# Altium PCB PCB.PcbDoc
Units mm, origin at the board's own origin, x right, y up, seen from the top; angles counter-clockwise.
Board outline 100 x 50 mm, 2 copper layers (Top Layer, Bottom Layer); 25 components, 19 nets, 85 pads, 0 vias.
Unrouted connection lines stored in the file: 1.
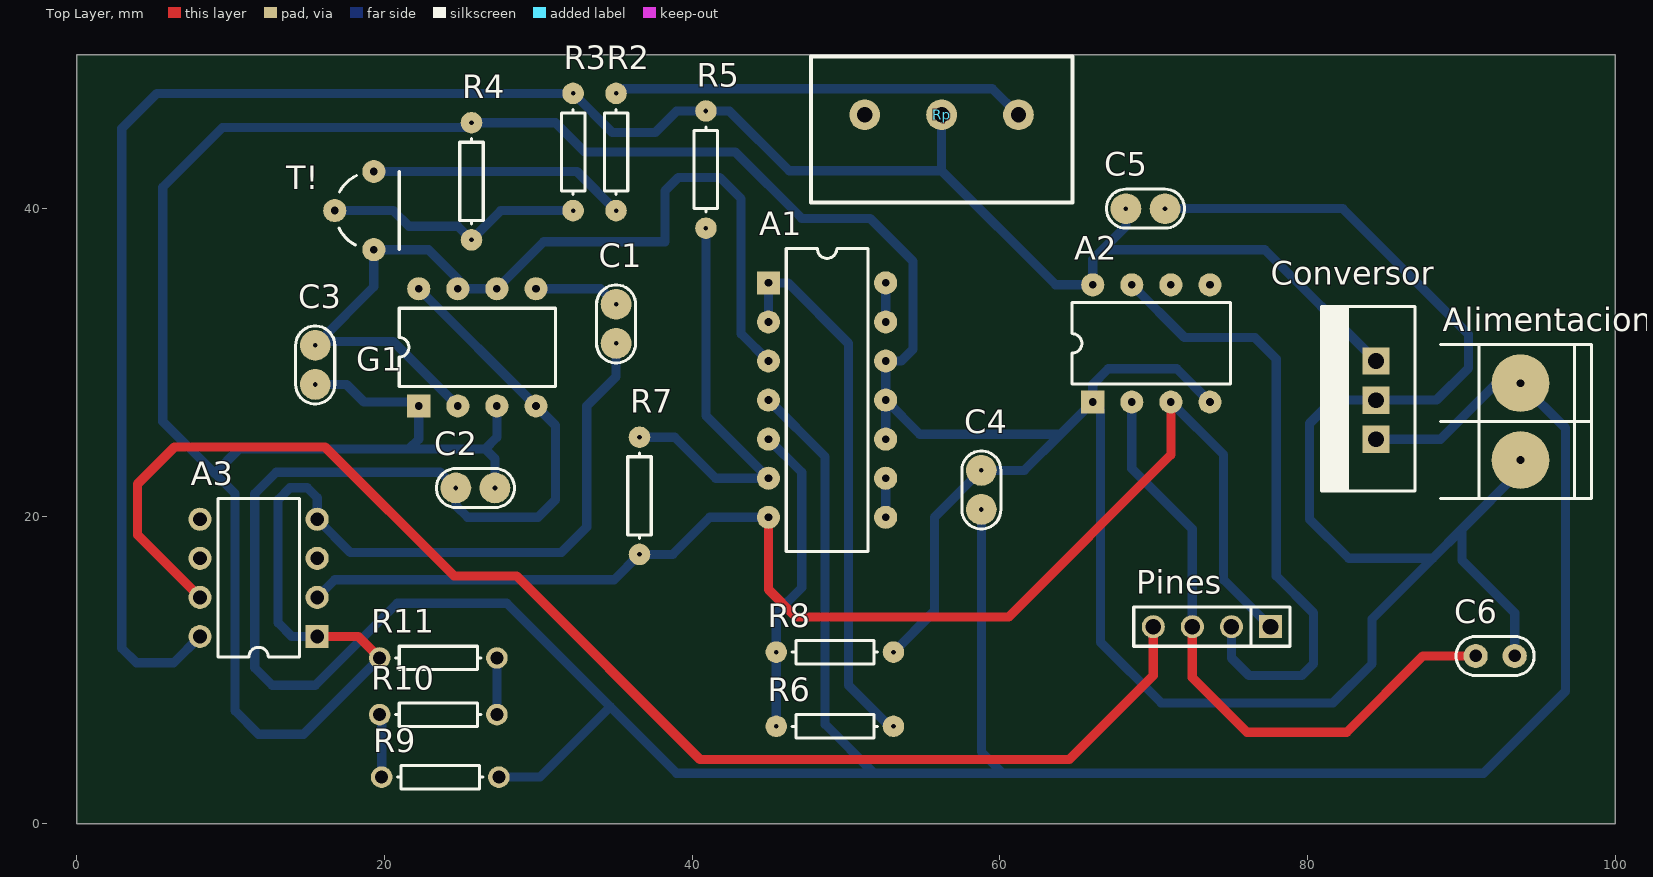
[diagram p0: Top Layer view]
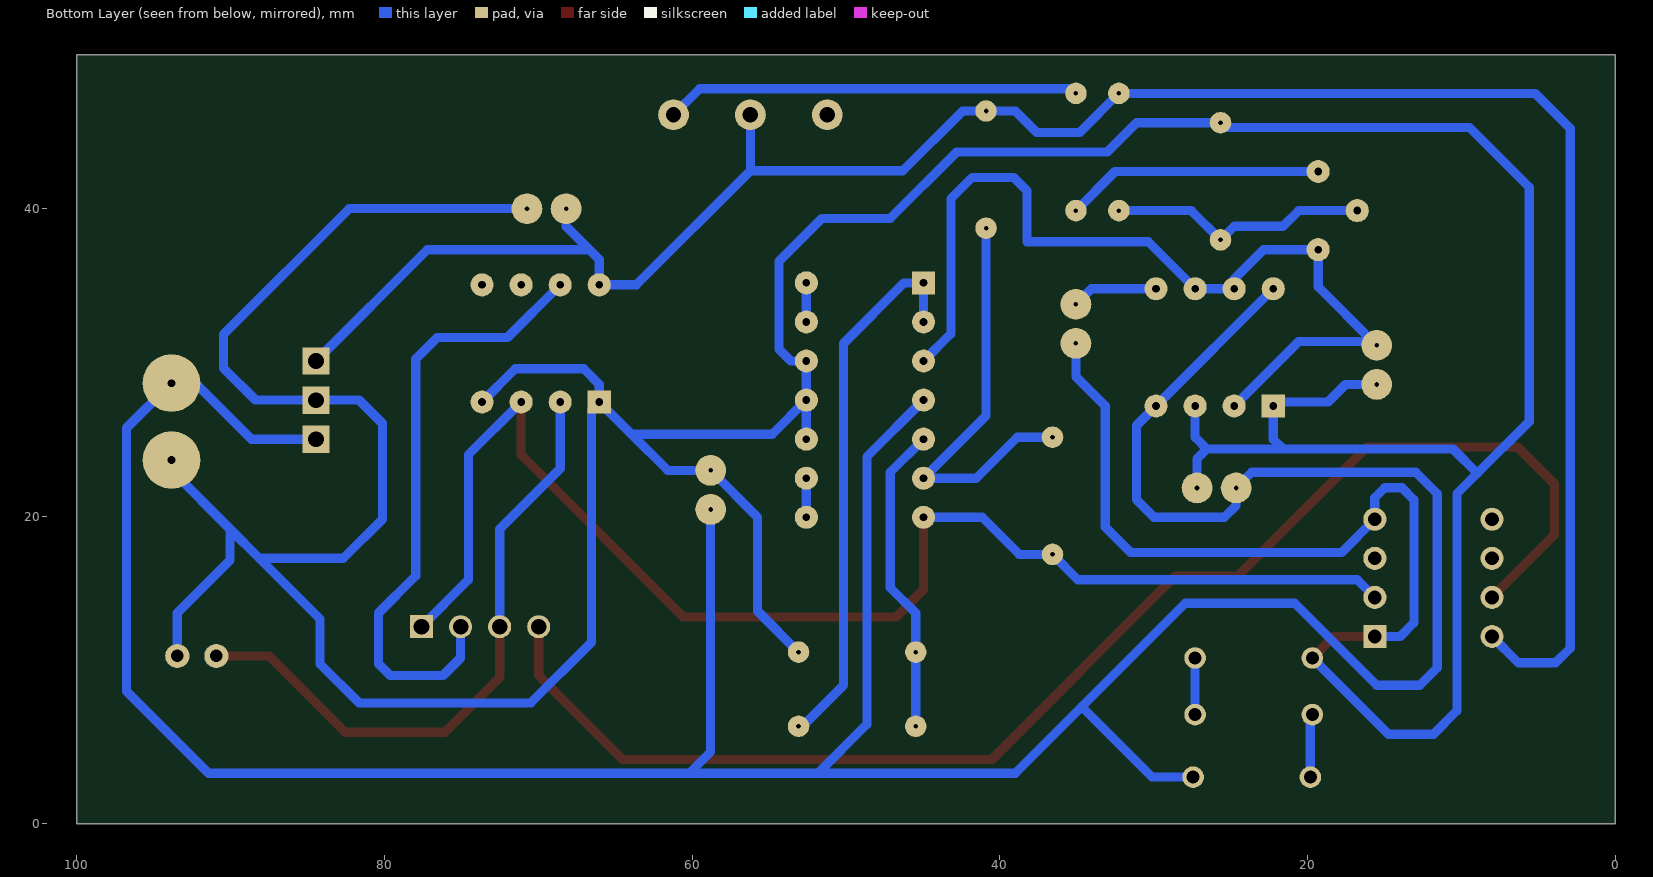
[diagram p1: Bottom Layer view, seen from below]

## Layer stack, top to bottom
Top Solder: solder mask 0.0102, Solder Resist, Dk 3.5
Top Layer: signal copper 0.0356
Dielectric 1: dielectric 0.32, FR-4, Dk 4.8
Bottom Layer: signal copper 0.0356
Bottom Solder: solder mask 0.0102, Solder Resist, Dk 3.5

## Board outline
0,0 100,0 100,50 0,50

## Design rules (kind name [scope] priority, off if disabled: settings)
Clearance [All] p1: gap=0.4
PolygonConnect [All] p1: connectstyle=Relief reliefconductorwidth=0.254 reliefentries=4 polygonreliefangle="90 Angle" airgapwidth=0.254
RoutingVias [All] p1: holewidth=0.5 width=2 viastyle="Through Hole" minholewidth=0.5 minwidth=2 maxholewidth=0.5 maxwidth=2
SolderMaskExpansion [All] p1: expansion=0.102
Width [All] p1: maxlimit=0.6 minlimit=0.6 preferedwidth=0.6
30 further rules are at their usual default settings.

## Components (designator, comment, footprint, x,y, rotation, side; value= is the part's Value field where it differs from the comment)
A1 "LM324N" N014 48.768,27.559 r270 top
A2 "LM111JG" JG008#1 69.85,31.242 r0 top
A3 "LM111JG" JG008#2 11.811,16.002 r90 top
Alimentacion "BORNERA 2" BORNERA2 93.853,26.162 r180 top
C1 "0.1u" CAP100#1 35.052,32.512 r270 top
C2 "1p" CAP100#1 25.908,21.844 r0 top
C3 "220u" CAP100#1 15.494,29.845 r270 top
C4 "100n" CAP100#1 58.801,21.717 r90 top
C5 "100n" CAP100#1 69.469,40.005 r0 top
C6 "110u" CAP100#2 92.202,10.922 r0 top
Conversor "7805" "TO-220 V" 84.455,27.559 r90 top
G1 "LM555" DIP8 22.225,27.178 r90 top
Pines "CON4" SIP4 73.787,12.827 r180 top
R2 "Res1" AXIAL-0.3#1 35.052,43.688 r90 top
R3 "Res1" AXIAL-0.3#1 32.258,43.688 r90 top
R4 "Res1" AXIAL-0.3#1 25.654,41.783 r270 top
R5 "Res1" AXIAL-0.3#1 40.894,42.545 r90 top
R6 "Res1" AXIAL-0.3#1 49.276,6.35 r0 top
R7 "Res1" AXIAL-0.3#1 36.576,21.336 r90 top
R8 "Res1" AXIAL-0.3#1 49.276,11.176 r180 top
R9 "Res1" AXIAL-0.3#2 23.622,3.048 r0 top
R10 "Res1" AXIAL-0.3#2 23.495,7.112 r180 top
R11 "Res1" AXIAL-0.3#2 23.495,10.795 r0 top
Rp "POTENCIOMETRO" POTENCIOMETRO 56.214,46.101 r180 top
T! "TRANSISTOR PNP" TO92 18.034,39.878 r270 top

## Footprints (in the part's own frame and the unit in brackets; to place one, negate y for a bottom-side part, rotate by r counter-clockwise, add the part's x,y. Pads: shape width x height; smd on the part's side, far side on the other; paste and mask are expansions set on the pad)
AXIAL-0.3#1 [mm] "Axial Device, Thru-Hole; 2 Leads; 0.3 in Pin Spacing"
  round 1.4 hole 0.3: 1(-3.81,0) 2(3.81,0)
  silkscreen extent -2.77,-0.76 2.77,0.76
AXIAL-0.3#2 [mm] "Axial Device, Thru-Hole; 2 Leads; 0.3 in Pin Spacing"
  round 1.4 hole 0.85: 1(-3.81,0) 2(3.81,0)
  silkscreen extent -2.77,-0.76 2.77,0.76
BORNERA2 [mm] "Bornera con Tornillos 5mm separación"
  round 3.75 hole 0.5: 1(0,2.5) 2(0,-2.5)
  silkscreen extent -4.6,-5 5.2,5, body extent -3.76,-4.89 3.94,5.61, height 10
CAP100#1 [mm]
  round 2 hole 0.3: 1(-1.27,0) 2(1.27,0)
  silkscreen extent -2.54,-1.27 2.54,1.27, body extent -2.92,-0.84 2.92,0.86, height 6.12
CAP100#2 [mm]
  round 1.575 hole 0.813: 1(-1.27,0) 2(1.27,0)
  silkscreen extent -2.54,-1.27 2.54,1.27, body extent -2.92,-0.84 2.92,0.86, height 6.12
DIP8 [mm]
  rect 1.5x1.5 hole 0.5: 1(0,0)
  round 1.5 hole 0.5: 2(0,-2.54) 3(0,-5.08) 4(0,-7.62) 5(7.62,-7.62) 6(7.62,-5.08) 7(7.62,-2.54) 8(7.62,0)
  silkscreen extent 1.27,-8.89 6.35,1.27, body extent -0.06,-9.21 7.7,1.59, height 4.5
JG008#1 [mm] "DIP; 8 Leads; Row Spacing 7.62 mm; Pitch 2.54 mm"
  rect 1.5x1.5 hole 0.5: 1(-3.81,-3.81)
  round 1.5 hole 0.5: 2(-1.27,-3.81) 3(1.27,-3.81) 4(3.81,-3.81) 5(3.81,3.81) 6(1.27,3.81) 7(-1.27,3.81) 8(-3.81,3.81)
  silkscreen extent -5.15,-2.65 5.15,2.65, body extent -5.08,-3.93 5.08,3.93, height 5.08
JG008#2 [mm] "DIP; 8 Leads; Row Spacing 7.62 mm; Pitch 2.54 mm"
  rect 1.5x1.5 hole 0.9: 1(-3.81,-3.81)
  round 1.5 hole 0.9: 2(-1.27,-3.81) 3(1.27,-3.81) 4(3.81,-3.81) 5(3.81,3.81) 6(1.27,3.81) 7(-1.27,3.81) 8(-3.81,3.81)
  silkscreen extent -5.15,-2.65 5.15,2.65, body extent -5.08,-3.93 5.08,3.93, height 5.08
N014 [mm] "DIP; 14 Leads; Row Spacing 7.62 mm; Pitch 2.54 mm"
  rect 1.5x1.5 hole 0.5: 1(-7.62,-3.81)
  round 1.5 hole 0.5: 2(-5.08,-3.81) 3(-2.54,-3.81) 4(0,-3.81) 5(2.54,-3.81) 6(5.08,-3.81) 7(7.62,-3.81) 8(7.62,3.81) 9(5.08,3.81) 10(2.54,3.81) 11(0,3.81) 12(-2.54,3.81) 13(-5.08,3.81) 14(-7.62,3.81)
  silkscreen extent -9.85,-2.65 9.85,2.65
POTENCIOMETRO [mm]
  round 2 hole 1: 1(-5,0) 2(0,0) 3(5,0)
  silkscreen extent -8.5,-3.8 8.5,5.7, body extent -7.87,-20.53 7.87,5.03, height 20.12
SIP4 [mm]
  rect 1.5x1.5 hole 1.016: 1(-3.81,0)
  round 1.5 hole 1.016: 2(-1.27,0) 3(1.27,0) 4(3.81,0)
  silkscreen extent -5.08,-1.27 5.08,1.27, body extent -5.08,-1.27 5.08,1.27, height 8.38
TO92 [mm]
  round 1.5 hole 0.5: 1(0,-1.27) 2(2.54,1.27) 3(-2.54,1.27)
  silkscreen extent -2.54,-1 2.54,2.92, body extent -2.79,-1.55 2.79,2.79, height 8
"TO-220 V" [mil]
  rect 70x70 hole 40: 1(-100,0) 2(0,0) 3(100,0)
  silkscreen extent -232,-100 240,139, body extent -197,-79 197,118, height 709

## Part data
A1: "Quadruple Operational Amplifier"
A2 A3: "Differential Comparator with Strobe"
C1 C2 C3 C4 C5 C6: library part CAP
Conversor: library part 78XX, "REGULDOR POSITIVO"
G1: "Timer"
R2 R3 R4 R5 R6 R7 R8 R9 R10 R11: "Resistor"

## Nets (pads, with @x,y where several pads share a name; then routed paths per layer and width w, separated by ;. In a path a pad name is that pad's centre, name@x,y a point inside that pad or via, vN(x,y) a via of type N, cw(c..) or ccw(c..) an arc to the next point about the centre after c; other vN are vias at no path point)
5.15: A3.3 R10.1 R11.2 | length 3.7
  Bottom Layer w0.6: R10.1 R11.2
Enable: A2.7 Pines.2 | length 40.4
  Bottom Layer w0.6: A2.7 72.009,31.623 76.581,31.623 77.978,30.226 77.978,16.129 80.391,13.716 80.391,10.414 79.629,9.652 76.2,9.652 75.057,10.795 Pines.2
GND: A1.10 A1.11 A1.12 A2.1 A2.4 A3.1 A3.4 Alimentacion.1 C1.2 C2.2 C3.2 C4.2 C5.2 C6.2 Conversor.2 G1.1 G1.3 R4.1 R8.1 R11.1 | length 362.9
  Top Layer w0.6: A3.1 18.288,12.192 R11.1
  Bottom Layer w0.6: C3.2 17.526,28.575 18.669,27.432 21.971,27.432 G1.1 22.225,25.019 21.59,24.384 ; A3.1 13.97,12.192 13.081,13.081 13.081,21.082 13.859,21.86 14.97,21.86 15.621,21.209 A3.4 17.78,17.653 31.496,17.653 33.147,19.304 33.147,27.178 35.052,29.083 C1.2 ; R11.1 14.732,5.842 11.811,5.842 10.287,7.366 10.287,21.463 8.954,22.796 ; C2.2 27.178,23.749 26.543,24.384 ; G1.3 27.305,25.146 26.543,24.384 ; A1.10 A1.11 ; R8.1 55.753,13.843 55.753,19.939 C4.2 61.595,22.987 63.944,25.336 ; C5.2 82.296,40.005 90.471,31.83 90.471,29.638 88.392,27.559 Conversor.2 81.661,27.559 80.137,26.035 80.137,19.812 82.677,17.272 88.138,17.272 ; A2.4@73.787,27.559 A2.4 71.501,29.591 67.056,29.591 66.04,28.575 A2.1 ; C6.2 93.472,13.716 90.043,17.145 90.043,19.177 ; Alimentacion.1 93.853,22.987 90.043,19.177 ; 8.954,22.796 5.588,26.162 5.588,41.402 9.473,45.287 25.348,45.287 R4.1 31.115,45.593 33.02,43.688 42.799,43.688 47.117,39.37 51.562,39.37 54.356,36.576 54.356,30.861 53.594,30.099 A1.12 A1.11 ; 8.954,22.796 10.541,24.384 21.59,24.384 ; 21.59,24.384 26.543,24.384 ; A1.11 54.8,25.336 63.944,25.336 ; 63.944,25.336 A2.1 ; A2.1 66.548,26.924 66.548,11.811 70.485,7.874 81.661,7.874 84.201,10.414 84.201,13.335 88.138,17.272 ; 88.138,17.272 90.043,19.177
Joystick: A2.2 C6.1 Pines.3 | length 41.5
  Top Layer w0.6: Pines.3 72.517,9.525 76.073,5.969 82.55,5.969 87.503,10.922 C6.1
  Bottom Layer w0.6: A2.2 68.58,23.114 72.517,19.177 Pines.3
NetA1_1: A1.1 A1.2 R6.2 | length 35.6
  Bottom Layer w0.6: A1.2 A1.1 46.228,35.179 50.165,31.242 50.165,9.017 52.832,6.35 R6.2
NetA1_3: A1.3 C3.1 G1.2 G1.6 G1.7 T!.2 | length 60.6
  Bottom Layer w0.6: C3.1 C3.1@15.748,31.369 ; G1.2 20.574,31.369 C3.1@15.748,31.369 ; A1.3 43.18,31.877 43.18,40.64 41.783,42.037 39.116,42.037 38.227,41.148 38.227,37.846 30.353,37.846 G1.6 G1.7 24.765,35.433 22.86,37.338 T!.2 19.304,34.925 C3.1@15.748,31.369
NetA1_5: A1.5 R6.1 R8.2 | length 20.2
  Bottom Layer w0.6: A1.5 47.117,22.86 47.117,15.367 45.466,13.716 R8.2 R6.1
NetA1_6: A1.6 R5.1 R7.2 | length 27.4
  Bottom Layer w0.6: R7.2 38.862,25.146 41.529,22.479 A1.6 40.894,26.543 R5.1
NetA1_8: A1.8 A1.9 | length 2.5
  Bottom Layer w0.6: A1.8 A1.9
NetA1_13: A1.13 A1.14 | length 2.5
  Bottom Layer w0.6: A1.13 A1.14
NetC1_1: C1.1 G1.5 | length 5.6
  Bottom Layer w0.6: G1.5 34.036,34.798 C1.1
NetR2_1: R2.1 T!.3 | length 16.8
  Bottom Layer w0.6: T!.3 32.512,42.418 R2.1
NetR2_2: R2.2 Rp.1 | length 27.4
  Bottom Layer w0.6: R2.2 35.355,47.801 59.514,47.801 Rp.1 Rp.1@60.833,46.101
NetR3_1: R3.1 R4.2 T!.1 | length 17.1
  Bottom Layer w0.6: T!.1 20.574,39.878 21.59,38.862 24.765,38.862 R4.2 27.559,39.878 R3.1
NetR9_1: R9.1 R10.2 | length 4.1
  Bottom Layer w0.6: R10.2 19.812,6.985 R9.1
Rampa: A1.7 A2.3 A3.2 Pines.1 R7.1 | length 88.2
  Top Layer w0.6: A1.7 44.958,15.24 46.736,13.462 60.579,13.462 71.12,24.003 A2.3
  Bottom Layer w0.6: A3.2 16.764,15.875 34.925,15.875 R7.1 38.735,17.526 41.148,19.939 A1.7 ; A2.3 74.549,24.003 74.549,15.875 Pines.1
Reset: A3.7 Pines.4 | length 89.9
  Top Layer w0.6: A3.7 3.937,18.796 3.937,22.098 6.35,24.511 16.129,24.511 24.511,16.129 28.575,16.129 40.513,4.191 64.516,4.191 69.977,9.652 Pines.4
V5: A2.8 A3.8 C5.1 Conversor.3 R3.2 R5.2 Rp.2 | length 140.6
  Bottom Layer w0.6: A3.8 6.286,10.477 3.873,10.477 2.921,11.43 2.921,45.212 5.207,47.498 R3.2 34.798,44.958 37.592,44.958 38.989,46.355 R5.2 42.418,46.355 46.308,42.465 56.214,42.465 ; Rp.2 56.214,42.465 ; C5.1 68.199,38.862 66.675,37.338 ; Conversor.3 77.216,37.338 66.675,37.338 ; 56.214,42.465 63.627,35.052 A2.8 66.04,36.703 66.675,37.338
Vcc: A1.4 Alimentacion.2 C2.1 C4.1 Conversor.1 G1.4 G1.8 R9.2 | length 232
  Bottom Layer w0.6: G1.8 G1.4 31.115,25.908 31.115,21.082 29.972,19.939 25.4,19.939 24.638,20.701 C2.1 23.622,22.86 12.954,22.86 11.557,21.463 11.557,10.16 12.7,9.017 15.494,9.017 20.828,14.351 27.94,14.351 34.671,7.62 ; R9.2 30.099,3.048 34.671,7.62 ; A1.4 48.641,23.876 48.641,6.477 51.816,3.302 ; C4.1 58.801,4.699 60.198,3.302 ; Conversor.1 88.646,25.019 92.289,28.662 Alimentacion.2 96.774,25.741 96.774,8.636 91.44,3.302 60.198,3.302 ; 34.671,7.62 38.989,3.302 51.816,3.302 ; 51.816,3.302 60.198,3.302
pads on no net: A2.5 A2.6 A3.5 A3.6 Rp.3